# Altium PCB carcontroller.PcbDoc
Units mm, origin at the board's own origin, x right, y up, seen from the top; angles counter-clockwise.
Board outline 66 x 84 mm, 2 copper layers (Top Layer, Bottom Layer); 46 components, 32 nets, 135 pads, 5 vias.
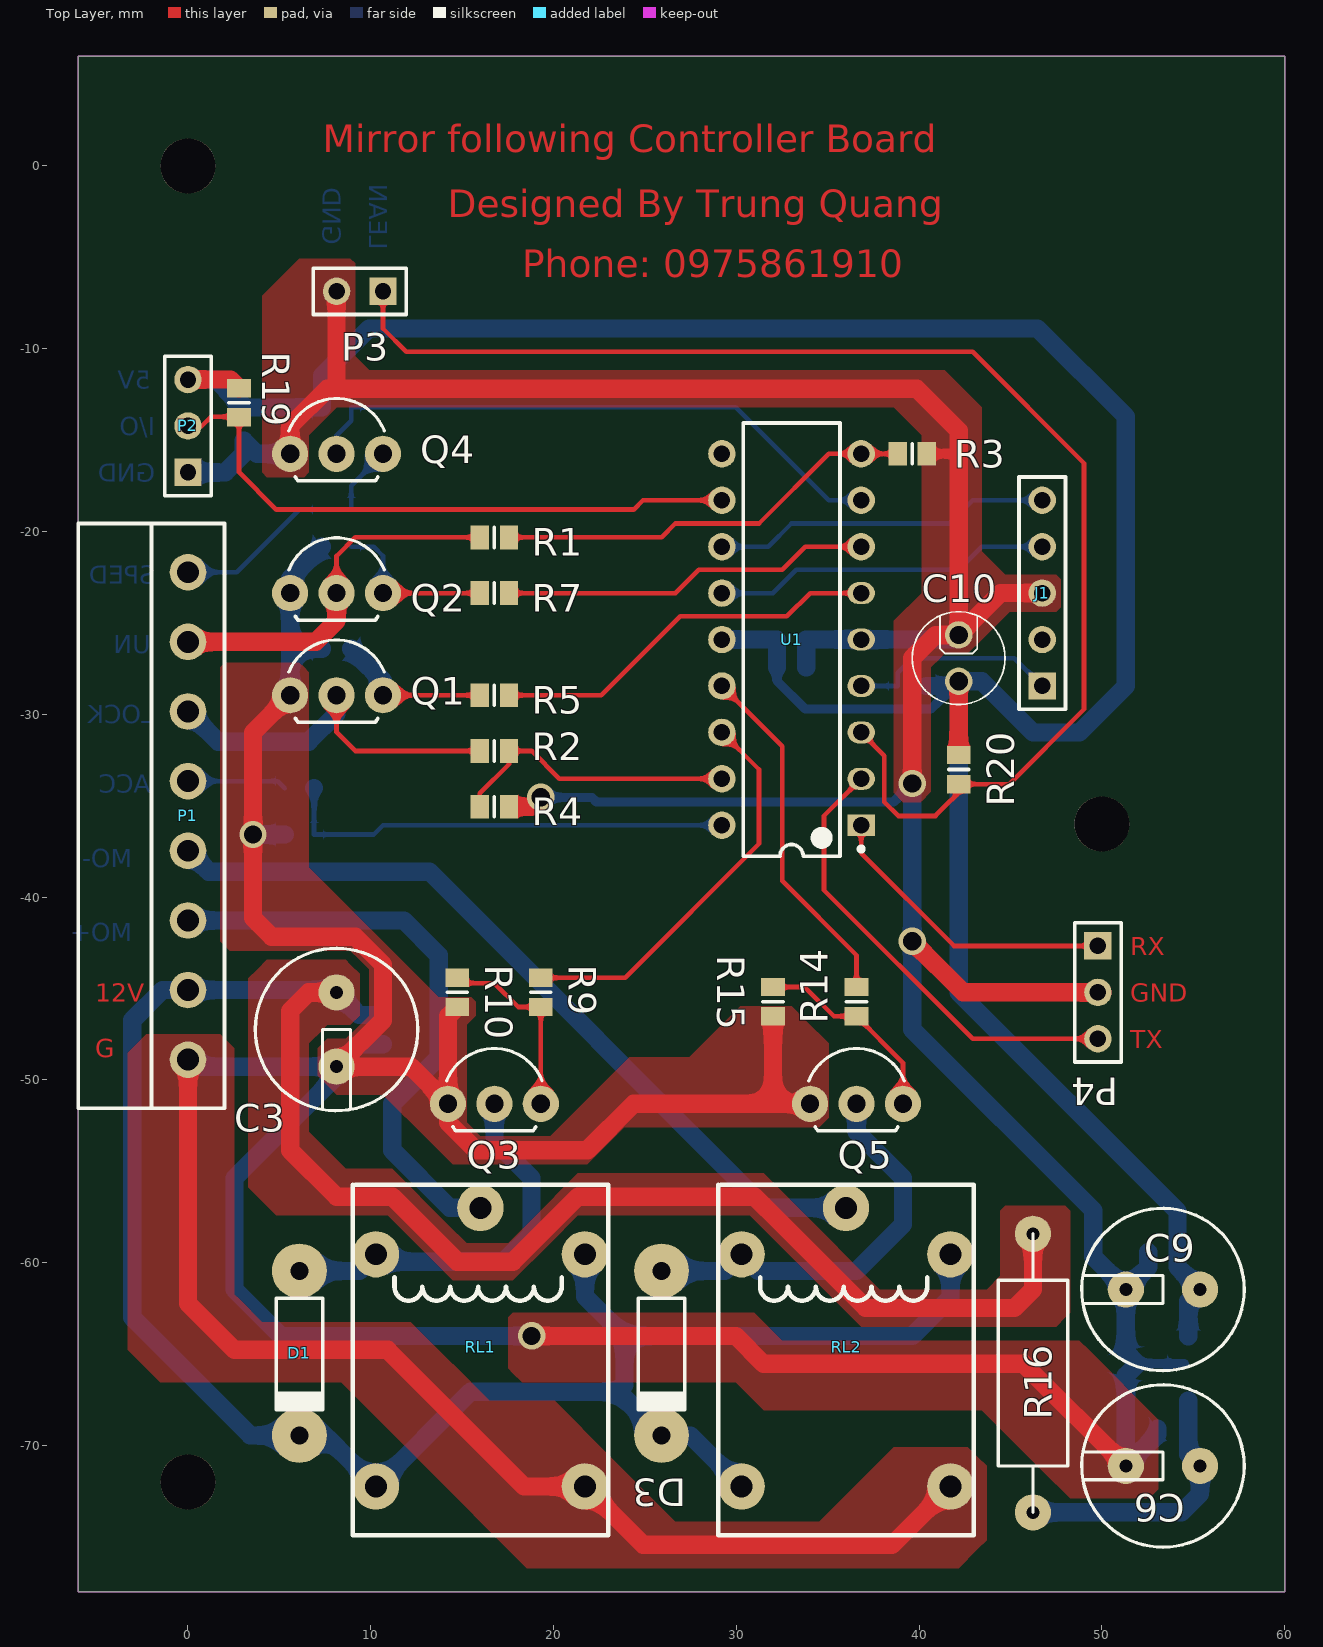
[diagram p0: Top Layer view]
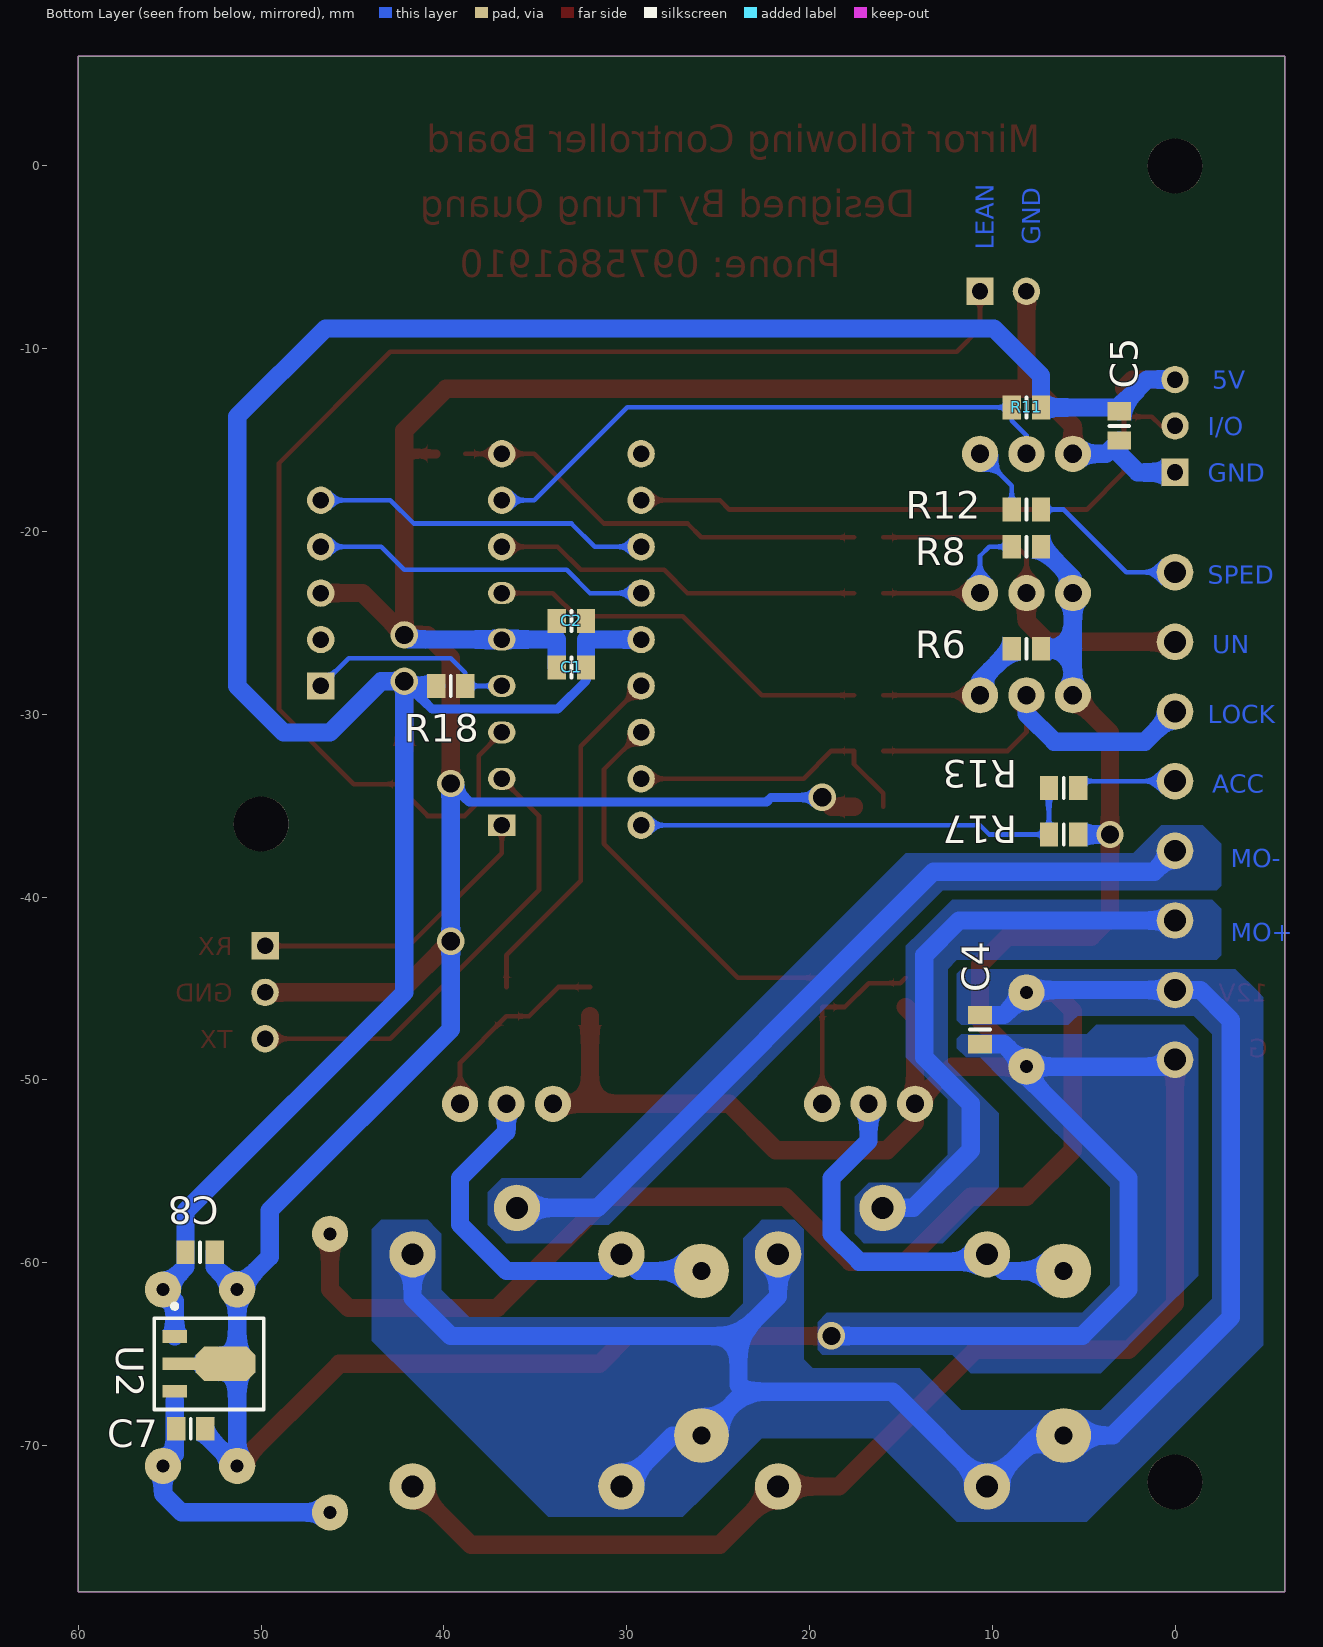
[diagram p1: Bottom Layer view, seen from below]

## Layer stack, top to bottom
Top Solder: solder mask 0.0102, Solder Resist, Dk 3.5
Top Layer: signal copper 0.0356
Dielectric1: dielectric 0.32, FR-4, Dk 4.8
Bottom Layer: signal copper 0.0356
Bottom Solder: solder mask 0.0102, Solder Resist, Dk 3.5

## Board outline
-6,-78 -6,6 60,6 60,-78

## Design rules (kind name [scope] priority, off if disabled: settings)
Clearance [All] p1: gap=0.254
HoleToHoleClearance [All] p1 off: gap=0.254 allowstackedmicrovias=TRUE
MinimumSolderMaskSliver [All] p1 off: minsoldermaskwidth=0.254
PolygonConnect [All] p1: connectstyle=Direct reliefconductorwidth=0.254 reliefentries=4 polygonreliefangle="90 Angle" airgapwidth=0.254
RoutingVias [All] p1: holewidth=0.711 width=1.27 viastyle="Through Hole" minholewidth=0.711 minwidth=1.27 maxholewidth=3 maxwidth=2
SilkToSolderMaskClearance SilkscreenOverComponentPads [IsPad] p1 off: minsilkscreentomaskgap=0.254 clearancetoexposedcopper=TRUE
SolderMaskExpansion [All] p1: expansion=0.102
Width [All] p1: maxlimit=2 minlimit=0.254 preferedwidth=0.3
27 further rules are at their usual default settings.

## Components (designator, comment, footprint, x,y, rotation, side; value= is the part's Value field where it differs from the comment)
C1 "Cap Semi" RESC2012L 33.02,-27.432 r180 bottom
C2 "Cap Semi" RESC2012L 33.02,-24.892 r180 bottom
C3 "Cap Pol3" CAPU150-175K 8.128,-47.244 r270 top
C4 "Cap Semi" RESC2012L 10.668,-47.244 r90 bottom
C5 "Cap Semi" RESC2012L 3.048,-14.224 r90 bottom
C6 "Cap Pol3" CAPU150-175K 53.34,-71.12 r180 top
C7 "Cap Semi" RESC2012L 53.848,-69.088 r0 bottom
C8 "Cap Semi" RESC2012L 53.34,-59.436 r0 bottom
C9 "Cap Pol3" CAPU150-175K 53.34,-61.468 r180 top
C10 "Cap Pol1" CAP5 42.164,-26.924 r270 top
D1 "" D1A 6.096,-60.452 r270 top
D3 "" D1A 25.908,-60.452 r270 top
J1 "programer" HDR1x5 46.736,-28.448 r90 top
P1 "Header 8" P8_150 0,-35.56 r90 top
P2 "touch_bt" HDR1X3 0,-16.764 r90 top
P3 "Header 2" HDR1X2 10.668,-6.858 r180 top
P4 "touch_bt" HDR1X3 49.784,-42.672 r270 top
Q1 "C1815" C1815 8.128,-28.956 r0 top
Q2 "C1815" C1815 8.128,-23.368 r0 top
Q3 "C1815" C1815 16.764,-51.308 r0 top
Q4 "C1815" C1815 8.128,-15.748 r0 top
Q5 "C1815" C1815 36.576,-51.308 r0 top
R1 "Res2" RESC2012L 16.764,-20.32 r0 top
R2 "Res2" RESC2012L 16.764,-32.004 r0 top
R3 "Res2" RESC2012L 39.624,-15.748 r180 top
R4 "Res2" RESC2012L 16.764,-35.052 r0 top
R5 "470" RESC2012L 16.764,-28.956 r180 top
R6 "Res2" RESC2012L 8.128,-26.416 r180 bottom
R7 "470" RESC2012L 16.764,-23.368 r0 top
R8 "Res2" RESC2012L 8.128,-20.828 r180 bottom
R9 "Res2" RESC2012L 19.304,-45.212 r90 top
R10 "Res2" RESC2012L 14.732,-45.212 r270 top
R11 "470" RESC2012L 8.128,-13.208 r0 bottom
R12 "470" RESC2012L 8.128,-18.796 r0 bottom
R13 "Res2" RESC2012L 6.096,-34.036 r180 bottom
R14 "Res2" RESC2012L 36.576,-45.72 r90 top
R15 "Res2" RESC2012L 32.004,-45.72 r270 top
R16 "Res2" R1W-600 46.228,-73.66 r90 top
R17 "Res2" RESC2012L 6.096,-36.576 r0 bottom
R18 "Res2" RESC2012L 39.624,-28.448 r180 bottom
R19 "Res2" RESC2012L 2.794,-12.954 r270 top
R20 "Res2" RESC2012L 42.164,-33.02 r270 top
RL1 "" RL7 16,-57 r0 top
RL2 "" RL7 36,-57 r0 top
U1 "PIC18F1220-E/P" PDIP300-P18 33.02,-25.908 r180 top
U2 "µA78L05ACPKR" PK03 53.34,-65.532 r90 bottom

## Footprints (in the part's own frame and the unit in brackets; to place one, negate y for a bottom-side part, rotate by r counter-clockwise, add the part's x,y. Pads: shape width x height; smd on the part's side, far side on the other; paste and mask are expansions set on the pad)
C1815 [mil]
  round 78 hole 39.37: 1(100,0) 2(0,0) 3(-100,0)
  silkscreen extent -103,-58 103,119
CAP5 [mm]
  round 1.5 hole 1 mask+0.01: 1(1.27,0) 2(-1.27,0)
  silkscreen extent -2.54,-2.54 2.54,2.54
CAPU150-175K [mil]
  round 78 hole 28: 1(-80,0) 2(80,0)
  silkscreen extent -175,-175 175,175
D1A [mm]
  round 3 hole 1: 1(0,0) 2(9,0)
  silkscreen extent 1.5,-1.27 7.6,1.27
HDR1X2 [mm] "Connector; Header; 2 Position"
  rect 1.5x1.5 hole 0.9: 1(0,0)
  round 1.5 hole 0.9: 2(2.54,0)
  silkscreen extent -1.27,-1.27 3.81,1.27
HDR1X3 [mm] "Connector; Header; 3 Position"
  rect 1.5x1.5 hole 0.9: 1(0,0)
  round 1.5 hole 0.9: 2(2.54,0) 3(5.08,0)
  silkscreen extent -1.27,-1.27 6.35,1.27
HDR1x5 [mm] "Connector; Header; 5 Position"
  rect 1.5x1.5 hole 0.9: 1(0,0)
  round 1.5 hole 0.9: 2(2.54,0) 3(5.08,0) 4(7.62,0) 5(10.16,0)
  silkscreen extent -1.27,-1.27 11.43,1.27
P8_150 [mm]
  round 2 hole 1.2 mask+0.001: 1(-13.335,0) 2(-9.525,0) 3(-5.715,0) 4(-1.905,0) 5(1.905,0) 6(5.715,0) 7(9.525,0) 8(13.335,0)
  silkscreen extent -16,-2 16,6
PDIP300-P18 [mm] "DIP, 18-Leads, Row Spacing 7.62mm, Pitch 2.54mm, Body 22.9x6.6mm"
  rect 1.5x1.2 hole 0.9: 1(-3.81,10.16)
  oval 1.5x1.2 hole 0.9: 2(-3.81,7.62) 3(-3.81,5.08) 4(-3.81,2.54) 5(-3.81,0) 6(-3.81,-2.54)
  round 1.5 hole 0.9: 7(-3.81,-5.08) 8(-3.81,-7.62) 9(-3.81,-10.16) 10(3.81,-10.16) 11(3.81,-7.62) 12(3.81,-5.08) 13(3.81,-2.54) 14(3.81,0) 15(3.81,2.54) 16(3.81,5.08) 17(3.81,7.62) 18(3.81,10.16)
  silkscreen extent -3.94,-11.85 2.65,11.85, body extent -3.6,-11.8 3.6,11.8, height 5.34
PK03 [mm] "SOT-89; Body 4.6 x 4.25 mm, inc. leads (LxW max)"
  rect 0.7x1.35 smd: 1(1.5,1.388) 3(-1.5,1.388)
  rect 0.7x1.8 smd: 2(0,1.162)
  oct 1.9x3.3 smd: 4(0,-1.388)
  silkscreen extent -2.5,-3.49 3.27,2.51
R1W-600 [mil]
  round 78 hole 28: 1(0,0) 2(600,0)
  silkscreen extent 0,-75 600,75
RESC2012L [mm] "Chip Resistor, Body 2.0x1.3mm, IPC High Density"
  rect 1x1.3 smd: 1(-0.8,0) 2(0.8,0)
  silkscreen extent 0,-0.55 0,0.55, body extent -1.07,-0.7 1.07,0.7, height 0.65
RL7 [mm]
  round 2.54 hole 1.2: 1(0,0) 2(5.715,-15.24) 3(-5.715,-15.24) 4(5.715,-2.54) 5(-5.715,-2.54)
  silkscreen extent -6.98,-17.91 6.98,1.27

## Part data
C1 C2 C4 C5 C7 C8: "Capacitor (Semiconductor SIM Model)"
C3 C6 C9: "Polarized Capacitor (Surface Mount)"
C10: "Polarized Capacitor (Radial)"
D1 D3: library part DIODE, "Diode"
J1: library part CON5, "Connector"
P1: "Header, 8-Pin"
P2 P4: library part "Header 3", "Header, 3-Pin"
P3: "Header, 2-Pin"
Q1 Q2 Q3 Q4 Q5: library part NPN, "NPN Transistor"
R1 R2 R3 R4 R6 R8 R9 R10 R14 R15: library part RES2, "Resistor"
R5 R7 R11 R12: library part RES2
R13 R16 R17 R18 R19 R20: "Resistor"
RL1 RL2: library part RELAY-SPDT
U1: "High Performance, Enhanced Flash Microcontroller with 10-Bit A/D and nanoWatt Technology, 4K Flash, 18-Pin PDIP, Extended Temperature"
U2: "Positive-Voltage Regulator"

## Free pads (board coordinates)
  round 3 hole 3 mask+0.001: 0(0,-72) 1(0,0) 2(50,-36)

## Via types
v1: diameter 1.5, hole 1, Top Layer to Bottom Layer, 5 vias

## Nets (pads, with @x,y where several pads share a name; then routed paths per layer and width w, separated by ;. In a path a pad name is that pad's centre, name@x,y a point inside that pad or via, vN(x,y) a via of type N, cw(c..) or ccw(c..) an arc to the next point about the centre after c; other vN are vias at no path point)
12V: C3.1 C4.2 D1.2 D3.2 P1.2 R16.2 RL1.3 RL1.4 RL2.3 RL2.4 | length 163.5
  Top Layer w1: C3.1 6.604,-45.212 5.588,-46.228 5.588,-53.848 8.128,-56.388 11.176,-56.388 14.732,-59.944 17.78,-59.944 21.336,-56.388 30.988,-56.388 37.084,-62.484 45.212,-62.484 46.228,-61.468 R16.2
  Bottom Layer w1: C4.2 9.36,-46.444 C3.1 8.001,-45.085 P1.2 -1.397,-45.085 -3.048,-46.736 -3.048,-62.992 3.412,-69.452 D1.2 7.497,-69.452 RL1.3 15.469,-67.056 23.512,-67.056 ; RL1.4 21.715,-61.847 23.876,-64.008 ; RL2.3 27.497,-69.452 D3.2 23.512,-67.056 ; RL2.4 41.715,-61.917 39.624,-64.008 23.876,-64.008 ; 23.512,-67.056 23.876,-66.692 23.876,-64.008
+5V: C1.2 C2.2 C5.2 C8.2 C9.1 C10.1 P2.3 R11.1 R18.1 R19.1 R20.1 U1.14 U2.1 | length 149.4
  Top Layer w1: P2.3 2.324,-11.684 R19.1 ; R20.1@42.164,-31.966 C10.1
  Bottom Layer w0.5: C1.2 32.22,-28.156 33.782,-29.718 40.64,-29.718 41.91,-28.448 C10.1
  Bottom Layer w1: P2.3 1.524,-11.684 3.048,-13.208 C5.2 3.264,-13.208 R11.1 7.328,-11.468 9.906,-8.89 46.482,-8.89 51.308,-13.716 51.308,-28.448 48.768,-30.988 46.228,-30.988 43.434,-28.194 C10.1 42.164,-45.212 54.14,-57.188 C8.2 54.14,-60.236 C9.1 54.728,-62.112 U2.1 ; U1.14 32.22,-25.908 C1.2 ; R18.1 C10.1@41.91,-28.448
ACC_IN: P1.5 R13.2 | length 5.5
  Bottom Layer w0.254: P1.5 4.915,-33.655 R13.2
ACC_SIG: R13.1 R17.2 U1.18 | length 25.1
  Bottom Layer w0.254: R13.1 R17.2 10.16,-36.576 10.668,-36.068 U1.18
BT_IO: P2.2 R19.2 U1.11 | length 33.5
  Top Layer w0.254: P2.2 0.762,-14.224 1.27,-13.716 2.756,-13.716 R19.2 2.794,-16.764 4.826,-18.796 24.384,-18.796 24.892,-18.288 U1.11
DOOR_LOCK: P1.6 Q1.2 R2.1 | length 20.7
  Top Layer w0.254: Q1.2 8.128,-30.988 9.144,-32.004 R2.1
  Bottom Layer w1: P1.6 1.651,-31.496 6.604,-31.496 8.128,-29.972 Q1.2
DOOR_LOCK_C: R5.1 U1.6 | length 21.6
  Top Layer w0.254: R5.1 22.606,-28.956 26.924,-24.638 32.766,-24.638 34.036,-23.368 U1.6
DOOR_LOCK_SIG: R2.2 R4.1 U1.17 | length 16
  Top Layer w0.254: R4.1 15.964,-34.328 17.564,-32.728 R2.2 18.796,-32.004 20.32,-33.528 U1.17
DOOR_UNLOCK: P1.7 Q2.2 R1.1 | length 20.4
  Top Layer w0.254: Q2.2 8.128,-21.336 9.144,-20.32 R1.1
  Top Layer w1: P1.7 6.985,-26.035 8.128,-24.892 Q2.2
DOOR_UNLOCK_C: R7.2 U1.7 | length 20.3
  Top Layer w0.254: R7.2 26.67,-23.368 27.94,-22.098 32.512,-22.098 33.782,-20.828 U1.7
DOOR_UNLOCK_SIG: R1.2 R3.2 U1.9 | length 23.2
  Top Layer w0.254: R1.2 25.908,-20.32 26.67,-19.558 31.242,-19.558 35.052,-15.748 U1.9 R3.2
GND: C1.1 C2.1 C3.2 C4.1 C5.1 C6.2 C7.1 C8.1 C9.2 C10.2 J1.3 P1.1 P2.1 P3.2 P4.2 Q1.3 Q2.3 Q3.3 Q4.3 Q5.3 R3.1 R4.2 R6.2 R8.2 R10.2 R15.2 R17.1 RL1.2 RL2.2 U1.5 U2.2 U2.4 | length 396.3
  Top Layer w0.5: 12.446,-12.192 12.7,-11.938 ; 15.964,-12.23 16.002,-12.192 ; R3.1 42.164,-15.748
  Top Layer w1: P1.1 0,-62.23 2.54,-64.77 10.922,-64.77 18.392,-72.24 RL1.2 24.913,-75.438 38.517,-75.438 RL2.2 ; Q1.3 3.556,-30.988 v1(3.556,-36.576) 3.556,-41.148 4.572,-42.164 9.144,-42.164 10.668,-43.688 10.668,-46.736 C3.2 12.192,-49.276 Q3.3 ; Q4.3 5.588,-14.224 7.62,-12.192 8.128,-12.192 ; P3.2 8.128,-12.192 ; R10.2 14.224,-46.52 Q3.3 ; R4.2 18.796,-35.052 v1(19.304,-34.544) ; v1(18.796,-64.008) 29.972,-64.008 31.496,-65.532 45.72,-65.532 C6.2 ; R15.2 32.004,-51.308 ; Q5.3 32.004,-51.308 ; v1(39.624,-42.418) 42.418,-45.212 P4.2@50.038,-45.212 ; v1(39.624,-33.782) 39.624,-26.924 40.894,-25.654 C10.2 ; J1.3 44.45,-23.368 C10.2 ; 8.128,-12.192 12.446,-12.192 16.002,-12.192 39.878,-12.192 42.164,-14.478 42.164,-15.748 C10.2 ; Q3.3 14.224,-52.324 15.748,-53.848 21.844,-53.848 24.384,-51.308 32.004,-51.308
  Bottom Layer w0.5: v1(19.304,-34.544) 22.098,-34.544 22.352,-34.798 38.608,-34.798 v1(39.624,-33.782) ; U2.4 U2.2
  Bottom Layer w1: P1.1 0.381,-49.276 C3.2 ; P2.1 2.032,-16.764 3.048,-15.748 C5.1 3.772,-15.748 Q4.3 ; v1(3.556,-36.576) R17.1 ; Q1.3 5.588,-26.416 ; R6.2 5.588,-26.416 ; R8.2 5.588,-22.568 Q2.3 5.588,-26.416 ; C4.1 9.36,-48.044 C3.2 ; v1(18.796,-64.008) 5.08,-64.008 2.54,-61.468 2.54,-55.372 8.128,-49.784 C3.2 ; C1.1 33.82,-25.908 U1.5 41.91,-25.908 C10.2 ; v1(39.624,-33.782) v1(39.624,-42.418) 39.624,-47.244 49.53,-57.15 49.53,-59.69 C9.2 ; C8.1 52.54,-60.236 C9.2 ; C7.1 53.048,-69.38 C6.2 51.308,-66.177 U2.4 51.308,-64.888 C9.2
MO_TURN_LEFT: R14.2 U1.15 | length 19.5
  Top Layer w0.254: U1.15 32.512,-31.75 32.512,-39.116 36.576,-43.18 R14.2
MO_TURN_RIGHT: R9.2 U1.16 | length 21.9
  Top Layer w0.254: R9.2 23.914,-44.412 31.242,-37.084 31.242,-33.02 U1.16
MOTOR_N: P1.4 RL2.1 | length 44.1
  Bottom Layer w1: P1.4 1.143,-38.608 13.208,-38.608 31.6,-57 RL2.1
MOTOR_P: P1.3 RL1.1 | length 32.4
  Bottom Layer w1: P1.3 11.811,-41.275 13.716,-43.18 13.716,-48.768 11.176,-51.308 11.176,-53.848 14.328,-57 RL1.1
NetC6_1: C6.1 C7.2 R16.1 U2.3 | length 14.9
  Bottom Layer w1: R16.1 54.356,-73.66 55.372,-72.644 C6.1 54.728,-70.476 54.728,-67.54
NetD1_1: D1.1 Q3.2 RL1.5 | length 21.8
  Bottom Layer w1: D1.1 9.373,-60.452 RL1.5 10.689,-59.944 17.272,-59.944 18.796,-58.42 18.796,-55.372 16.764,-53.34 Q3.2
NetD3_1: D3.1 Q5.2 RL2.5 | length 22.7
  Bottom Layer w1: D3.1 29.373,-60.452 RL2.5 31.197,-60.452 36.576,-60.452 39.116,-57.912 39.116,-55.372 36.576,-52.832 Q5.2
NetQ1_1: Q1.1 R5.2 R6.1 | length 8.6
  Top Layer w0.254: Q1.1 R5.2
  Bottom Layer w1: R6.1 10.668,-28.156 Q1.1
NetQ2_1: Q2.1 R7.1 R8.1 | length 9.3
  Top Layer w0.254: Q2.1 R7.1
  Bottom Layer w0.254: R8.1 10.16,-20.828 10.668,-21.336 Q2.1
NetQ3_1: Q3.1 R9.1 R10.1 | length 10.5
  Top Layer w0.254: R10.1 15.024,-44.704 16.764,-44.704 18.072,-46.012 R9.1 Q3.1
NetQ4_1: Q4.1 R12.2 | length 3.8
  Bottom Layer w0.254: R12.2 8.928,-17.488 Q4.1
NetQ5_1: Q5.1 R14.1 R15.1 | length 11.1
  Top Layer w0.254: R15.1 33.744,-44.92 35.344,-46.52 R14.1 39.116,-49.06 Q5.1
PGC: J1.5 U1.12 | length 18.6
  Bottom Layer w0.254: U1.12 31.75,-20.828 33.02,-19.558 41.656,-19.558 42.926,-18.288 J1.5
PGD: J1.4 U1.13 | length 18.6
  Bottom Layer w0.254: U1.13 32.004,-23.368 33.274,-22.098 42.164,-22.098 43.434,-20.828 J1.4
RST: J1.1 R18.2 U1.4 | length 11.6
  Bottom Layer w0.254: U1.4 R18.2 38.824,-27.724 39.624,-26.924 45.212,-26.924 J1.1
RX: P4.1 U1.1 | length 16.8
  Top Layer w0.254: U1.1 36.83,-37.592 41.91,-42.672 P4.1@50.038,-42.672
SPEED_LEANING: P3.1 R20.2 U1.3 | length 74.9
  Top Layer w0.254: P3.1 10.668,-8.89 11.938,-10.16 42.926,-10.16 49.022,-16.256 49.022,-29.718 44.92,-33.82 42.634,-33.82 40.894,-35.56 38.862,-35.56 38.1,-34.798 38.1,-32.258 U1.3
SPEED_SIGNAL_I: P1.8 R12.1 | length 8.7
  Bottom Layer w0.254: P1.8 2.667,-22.225 6.096,-18.796 R12.1
SPEED_SIGNAL_O: Q4.2 R11.2 U1.8 | length 32.9
  Bottom Layer w0.254: Q4.2 8.128,-14.732 8.928,-13.932 R11.2 29.972,-13.208 35.052,-18.288 U1.8
TX: P4.3 U1.2 | length 25.5
  Top Layer w0.254: U1.2 34.798,-35.56 34.798,-39.624 42.926,-47.752 P4.3@50.038,-47.752
pads on no net: J1.2 U1.10

## Polygon pours and split planes (outlines as drawn)
GND on Top Layer "Bottom Layer-No Net 1" (solid, pour order 12): 8.89,-5.08 6.096,-5.08 5.842,-5.334 4.064,-7.112 4.064,-10.414 4.064,-16.764 4.318,-17.018 5.588,-17.018 6.35,-17.018 6.604,-16.764 6.604,-15.748 6.604,-14.732 7.62,-13.716 8.128,-13.208 9.144,-13.208 38.608,-13.208 39.624,-14.224 40.132,-14.732 40.132,-15.494 40.132,-23.368 38.608,-24.892 38.608,-32.766 38.608,-34.29 39.116,-34.798 39.624,-34.798 40.132,-34.798 40.386,-34.544 40.64,-34.29 40.64,-27.94 40.64,-27.432 41.148,-26.924 41.402,-26.67 42.672,-26.67 43.434,-25.908 44.958,-24.384 46.736,-24.384 47.498,-24.384 47.752,-24.13 47.752,-23.114 47.752,-22.606 47.498,-22.352 46.482,-22.352 44.704,-22.352 43.434,-21.082 43.434,-16.764 43.434,-13.208 41.656,-11.43 41.402,-11.176 36.83,-11.176 9.906,-11.176 9.398,-10.668 9.144,-10.414 9.144,-6.604 9.144,-5.334 8.89,-5.08
GND on Top Layer "Bottom Layer-No Net 1" (solid, pour order 10): 6.35,-27.432 6.096,-27.178 2.54,-27.178 2.032,-27.178 1.778,-27.432 1.778,-33.528 1.778,-42.418 2.286,-42.926 5.588,-42.926 8.89,-42.926 9.398,-43.434 9.906,-43.942 9.906,-46.482 9.144,-47.244 8.636,-47.752 8.128,-47.752 7.62,-47.752 7.366,-48.006 7.112,-48.26 7.112,-49.784 7.874,-50.546 8.128,-50.8 10.16,-50.8 10.668,-50.8 13.208,-53.34 14.478,-54.61 19.05,-54.61 21.844,-54.61 23.368,-53.086 23.876,-52.578 27.178,-52.578 34.544,-52.578 35.052,-52.07 35.052,-50.292 35.052,-48.006 33.782,-46.736 33.02,-45.974 32.004,-45.974 30.226,-45.974 29.972,-46.228 27.432,-48.768 24.384,-48.768 24.13,-48.768 22.352,-50.546 19.812,-53.086 17.78,-53.086 16.002,-53.086 15.24,-52.324 15.24,-51.054 15.24,-46.99 15.748,-46.482 15.748,-45.72 15.494,-45.466 14.478,-45.466 13.716,-45.466 11.938,-43.688 6.604,-38.354 6.604,-32.258 6.604,-27.686 6.35,-27.432
12V on Top Layer "Bottom Layer-No Net 1" (solid, pour order 8): 8.89,-43.688 8.636,-43.434 4.572,-43.434 4.318,-43.434 3.81,-43.942 3.302,-44.45 3.302,-49.022 3.302,-55.88 4.572,-57.15 4.826,-57.404 9.652,-57.404 10.922,-57.404 11.684,-58.166 14.478,-60.96 16.51,-60.96 17.78,-60.96 19.812,-58.928 21.336,-57.404 23.622,-57.404 30.734,-57.404 33.02,-59.69 36.83,-63.5 38.862,-63.5 47.498,-63.5 48.006,-62.992 48.26,-62.738 48.26,-59.436 48.26,-57.15 48.006,-56.896 46.228,-56.896 44.704,-56.896 44.45,-57.15 44.45,-58.674 44.45,-60.706 43.688,-61.468 41.91,-61.468 37.846,-61.468 33.274,-56.896 31.496,-55.118 24.892,-55.118 21.336,-55.118 18.796,-57.658 17.526,-58.928 15.494,-58.928 15.24,-58.928 14.224,-57.912 11.176,-54.864 9.144,-54.864 8.636,-54.864 6.604,-52.832 6.604,-48.768 6.604,-48.006 7.366,-47.244 7.62,-46.99 8.89,-46.99 9.398,-46.482 9.398,-44.196
GND on Top Layer "Bottom Layer-No Net 1" (solid, pour order 6): 1.778,-47.498 -2.286,-47.498 -3.302,-48.514 -3.302,-49.784 -3.302,-64.77 -1.524,-66.548 4.064,-66.548 8.382,-66.548 12.7,-70.866 18.542,-76.708 25.908,-76.708 42.164,-76.708 43.18,-75.692 43.688,-75.184 43.688,-72.39 43.688,-71.12 43.18,-70.612 42.672,-70.104 40.64,-70.104 38.608,-70.104 35.814,-72.898 34.544,-74.168 31.242,-74.168 26.67,-74.168 23.114,-70.612 20.066,-67.564 17.018,-67.564 16.51,-67.564 12.446,-63.5 12.192,-63.246 7.366,-63.246 4.064,-63.246 2.794,-61.976 2.54,-61.722 2.54,-59.944 2.54,-48.26 1.778,-47.498
GND on Top Layer "Bottom Layer-No Net 1" (solid, pour order 4): 17.78,-62.738 17.526,-62.992 17.526,-65.278 17.526,-65.786 17.78,-66.04 18.288,-66.548 22.86,-66.548 29.972,-66.548 31.242,-67.818 31.496,-68.072 41.91,-68.072 43.434,-68.072 46.736,-71.374 48.26,-72.898 52.324,-72.898 52.578,-72.898 52.832,-72.644 53.086,-72.39 53.086,-70.612 53.086,-68.58 49.276,-64.77 48.768,-64.262 41.402,-64.262 32.512,-64.262 30.988,-62.738 17.78,-62.738
MOTOR_N on Bottom Layer "Bottom Layer-No Net 1" (solid, pour order 20): 0.762,-36.068 -1.524,-36.068 -2.54,-37.084 -2.54,-37.846 -2.54,-39.37 -2.286,-39.624 -1.016,-39.624 12.7,-39.624 14.732,-41.656 30.988,-57.912 32.004,-57.912 33.02,-58.928 36.068,-58.928 36.576,-58.928 37.084,-58.42 37.592,-57.912 37.592,-56.134 37.084,-55.626 36.83,-55.372 34.29,-55.372 32.512,-55.372 28.448,-51.308 14.732,-37.592 11.176,-37.592 2.286,-37.592 1.524,-36.83
MOTOR_P on Bottom Layer "Bottom Layer-No Net 1" (solid, pour order 18): -2.286,-43.434 -2.54,-43.18 -2.54,-42.418 -2.54,-40.64 -2.286,-40.386 -2.032,-40.132 0.508,-40.132 12.192,-40.132 13.97,-41.91 14.732,-42.672 14.732,-47.752 14.732,-48.768 12.954,-50.546 12.446,-51.054 12.446,-53.594 12.446,-54.102 13.208,-54.864 13.97,-55.626 16.51,-55.626 16.764,-55.626 17.526,-56.388 17.526,-57.658 17.526,-58.42 17.272,-58.674 17.018,-58.928 15.494,-58.928 12.7,-58.928 11.43,-57.658 9.652,-55.88 9.652,-51.816 12.192,-49.276 12.446,-49.022 12.446,-46.736 12.446,-43.942 11.938,-43.434 10.922,-43.434 -2.286,-43.434
GND on Bottom Layer "Bottom Layer-No Net 1" (solid, pour order 16): 11.684,-47.498 10.16,-47.498 5.08,-47.498 4.826,-47.498 4.318,-46.99 2.54,-46.99 -0.508,-46.99 -1.016,-47.498 -1.27,-47.752 -1.27,-49.276 -1.27,-60.706 1.016,-62.992 4.064,-66.04 6.096,-66.04 11.176,-66.04 12.192,-65.024 19.05,-65.024 19.304,-65.024 19.558,-64.77 19.558,-64.008 19.558,-63.246 19.05,-62.738 15.494,-62.738 5.08,-62.738 4.064,-61.722 3.556,-61.214 3.556,-57.15 3.556,-55.88 9.398,-50.038 10.668,-48.768 11.43,-48.768 11.938,-48.26 11.938,-47.752
12V on Bottom Layer "Bottom Layer-No Net 1" (solid, pour order 14): 11.684,-43.942 7.366,-43.942 -3.302,-43.942 -4.572,-45.212 -4.826,-45.466 -4.826,-49.53 -4.826,-64.516 -0.762,-68.58 4.826,-74.168 9.652,-74.168 11.938,-74.168 13.462,-72.644 16.51,-69.596 19.304,-69.596 22.606,-69.596 25.654,-72.644 26.924,-73.914 33.528,-73.914 34.29,-73.914 41.656,-66.548 43.942,-64.262 43.942,-59.436 43.942,-58.166 43.688,-57.912 43.434,-57.658 41.91,-57.658 40.894,-57.658 40.386,-58.166 40.132,-58.42 40.132,-61.468 39.116,-62.484 38.608,-62.992 29.21,-62.992 24.384,-62.992 23.622,-62.23 23.622,-61.214 23.622,-58.674 22.86,-57.912 22.606,-57.658 21.082,-57.658 20.828,-57.658 20.32,-58.166 20.32,-59.69 20.32,-65.278 19.812,-65.786 14.732,-65.786 13.97,-65.786 11.938,-67.818 11.684,-68.072 9.652,-68.072 4.064,-68.072 -1.016,-62.992 -2.032,-61.976 -2.032,-58.166 -2.032,-47.498 -1.27,-46.736 -1.016,-46.482 0.762,-46.482 5.334,-46.482 5.588,-46.736 5.842,-46.99 9.398,-46.99 11.684,-46.99 11.938,-46.736 11.938,-44.196 11.684,-43.942

## Keep-outs
Keep-Out Layer:
  the board outline again, w0.1

## Other copper
Top Layer:
  text "Mirror following Controller Board" at 7.366,0.762 h1.5
  text "Designed By Trung Quang" at 14.224,-2.794 h1.5
  text "Phone: 0975861910" at 18.288,-6.096 h1.5
  text "RX" at 51.562,-43.18 h1
  text "12V" at -5.08,-45.72 h1
  text "GND" at 51.562,-45.72 h1
  text "TX" at 51.562,-48.26 h1
  text "G" at -5.08,-48.768 h1
Bottom Layer:
  text "GND" at 7.366,-4.318 h1 r270
  text "LEAN" at 9.906,-4.572 h1 r270
  text "5V" at -2.032,-12.192 h1
  text "I/O" at -1.778,-14.732 h1
  text "GND" at -1.778,-17.272 h1
  text "SPED" at -1.778,-22.86 h1
  text "UN" at -2.032,-26.67 h1
  text "LOCK" at -1.778,-30.48 h1
  text "ACC" at -2.032,-34.29 h1
  text "MO-" at -3.048,-38.354 h1
  text "MO+" at -3.048,-42.418 h1

## Silkscreen, mask and mechanical layers (free items; w line width, h text height)
Mechanical 1:
  circle w0.1: c8,-61.5 r1.75